# Altium PCB slave.PcbDoc
Units mm, origin at the board's own origin, x right, y up, seen from the top; angles counter-clockwise.
Board outline 152.4 x 101.6 mm, 2 copper layers (Top Layer, Bottom Layer); 3 components, 4 nets, 48 pads, 0 vias.
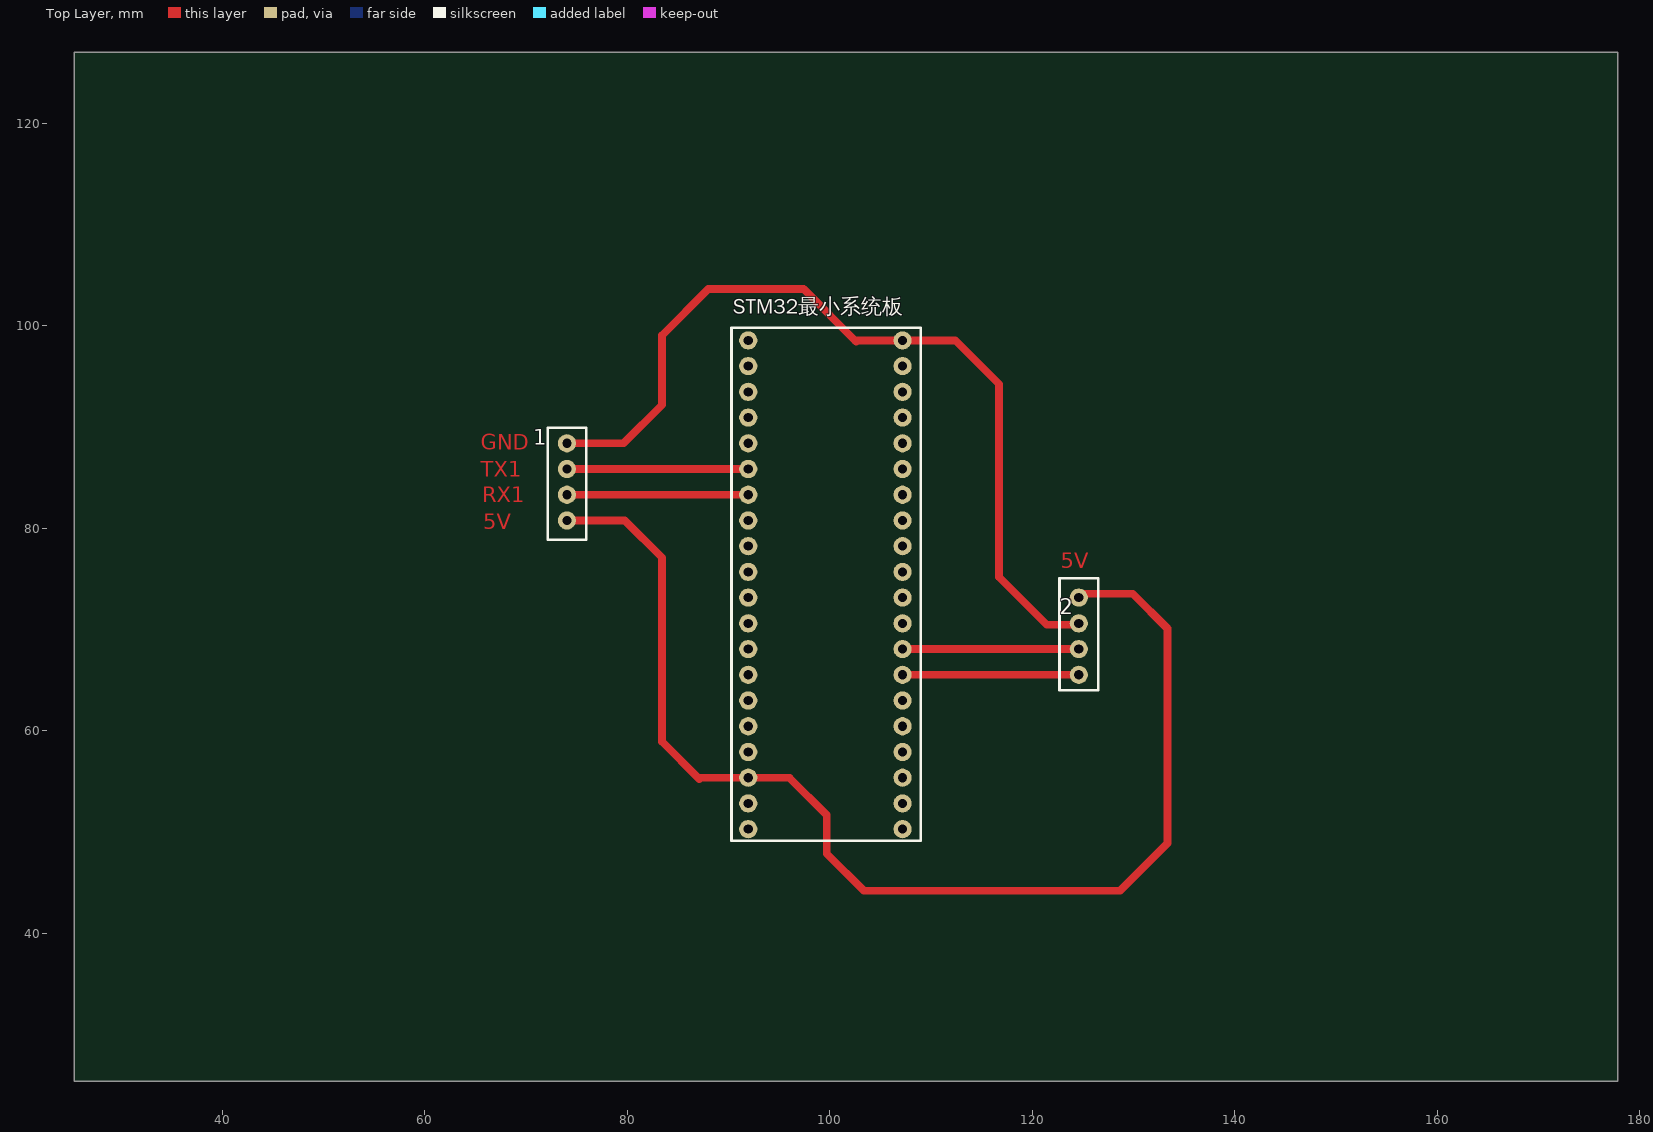
[diagram p0: Top Layer view]
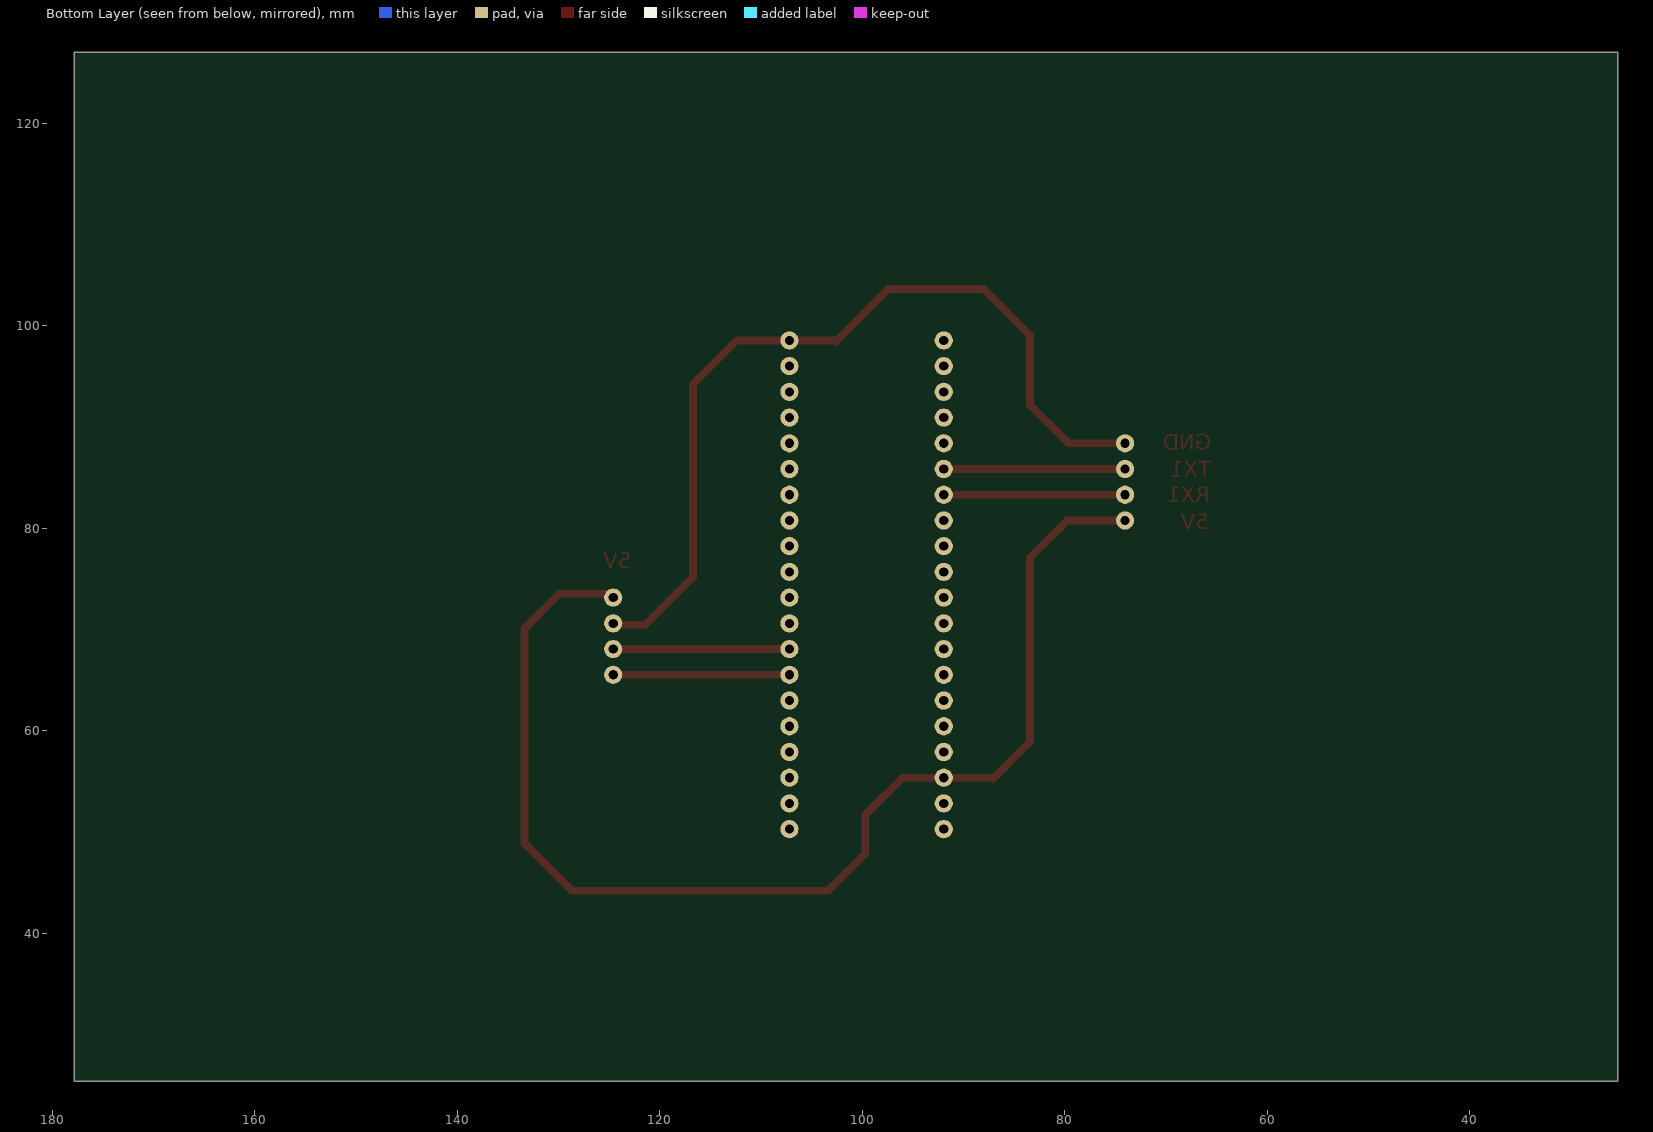
[diagram p1: Bottom Layer view, seen from below]

## Layer stack, top to bottom
Top Solder: solder mask 0.0102, Solder Resist, Dk 3.5
Top Layer: signal copper 0.0356
Dielectric 1: dielectric 0.32, FR-4, Dk 4.8
Bottom Layer: signal copper 0.0356
Bottom Solder: solder mask 0.0102, Solder Resist, Dk 3.5

## Board outline
25.4,25.4 177.8,25.4 177.8,127 25.4,127

## Design rules (kind name [scope] priority, off if disabled: settings)
Clearance [All] p1: gap=0.254
PolygonConnect [All] p1: connectstyle=Relief reliefconductorwidth=0.254 reliefentries=4 polygonreliefangle="90 Angle" airgapwidth=0.254
RoomDefinition slave [InComponentClass('slave')] p1: confinementstyle=ConfineIn formatcopy=TRUE lockcomponents=FALSE outline 0,0 50.8,0 50.8,25.4 0,25.4
RoutingVias [All] p1: holewidth=0.711 width=1.27 viastyle="Through Hole" minholewidth=0.711 minwidth=1.27 maxholewidth=0.711 maxwidth=1.27
SolderMaskExpansion [All] p1: expansion=0.102
Width [All] p1: maxlimit=0.254 minlimit=0.254 preferedwidth=0.254
30 further rules are at their usual default settings.

## Components (designator, comment, footprint, x,y, rotation, side; value= is the part's Value field where it differs from the comment)
1 "display" con4 74.041,80.772 r180 top
2 "bluetooth" con4 124.587,73.152 r0 top
STM32最小系统板 "STM32最小系统板" STM32最小系统板 91.948,98.552 r0 top

## Footprints (in the part's own frame and the unit in brackets; to place one, negate y for a bottom-side part, rotate by r counter-clockwise, add the part's x,y. Pads: shape width x height; smd on the part's side, far side on the other; paste and mask are expansions set on the pad)
con4 [mm]
  round 1.8 hole 0.9: 1(0,0) 2(0,-2.54) 3(0,-5.08) 4(0,-7.62)
  silkscreen extent -1.91,-9.14 1.91,1.91
STM32最小系统板 [mm]
  round 1.8 hole 0.9: 1(0,0) 2(0,-2.54) 3(0,-5.08) 4(0,-7.62) 5(0,-10.16) 6(0,-12.7) 7(0,-15.24) 8(0,-17.78) 9(0,-20.32) 10(0,-22.86) 11(0,-25.4) 12(0,-27.94) 13(0,-30.48) 14(0,-33.02) 15(0,-35.56) 16(0,-38.1) 17(0,-40.64) 18(0,-43.18) 19(0,-45.72) 20(0,-48.26) 21(15.24,0) 22(15.24,-2.54) 23(15.24,-5.08) 24(15.24,-7.62) 25(15.24,-10.16) 26(15.24,-12.7) 27(15.24,-15.24) 28(15.24,-17.78) 29(15.24,-20.32) 30(15.24,-22.86) 31(15.24,-25.4) 32(15.24,-27.94) 33(15.24,-30.48) 34(15.24,-33.02) 35(15.24,-35.56) 36(15.24,-38.1) 37(15.24,-40.64) 38(15.24,-43.18) 39(15.24,-45.72) 40(15.24,-48.26)
  silkscreen extent -1.65,-49.4 17.02,1.27

## Part data
1 2: library part Component_1

## Nets (pads, with @x,y where several pads share a name; then routed paths per layer and width w, separated by ;. In a path a pad name is that pad's centre, name@x,y a point inside that pad or via, vN(x,y) a via of type N, cw(c..) or ccw(c..) an arc to the next point about the centre after c; other vN are vias at no path point)
RX1: 1.2 STM32最小系统板.7 | length 17.9
  Top Layer w0.762: 1.2 STM32最小系统板.7
RX2: 2.3 STM32最小系统板.33 | length 17.4
  Top Layer w0.762: STM32最小系统板.33 2.3
TX1: 1.3 STM32最小系统板.6 | length 17.9
  Top Layer w0.762: 1.3 STM32最小系统板.6
TX2: 2.4 STM32最小系统板.34 | length 17.4
  Top Layer w0.762: STM32最小系统板.34 2.4
pads on no net: 1.1 1.4 2.1 2.2 STM32最小系统板.1 STM32最小系统板.2 STM32最小系统板.3 STM32最小系统板.4 STM32最小系统板.5 STM32最小系统板.8 STM32最小系统板.9 STM32最小系统板.10 STM32最小系统板.11 STM32最小系统板.12 STM32最小系统板.13 STM32最小系统板.14 STM32最小系统板.15 STM32最小系统板.16 STM32最小系统板.17 STM32最小系统板.18 STM32最小系统板.19 STM32最小系统板.20 STM32最小系统板.21 STM32最小系统板.22 STM32最小系统板.23 STM32最小系统板.24 STM32最小系统板.25 STM32最小系统板.26 STM32最小系统板.27 STM32最小系统板.28 STM32最小系统板.29 STM32最小系统板.30 STM32最小系统板.31 STM32最小系统板.32 STM32最小系统板.35 STM32最小系统板.36 STM32最小系统板.37 STM32最小系统板.38 STM32最小系统板.39 STM32最小系统板.40
copper on no net: | length 207.7
  Top Layer w0.762: 74.041,80.772 79.756,80.772 83.439,77.089 83.439,58.928 87.122,55.245 ; 74.041,88.392 79.629,88.392 83.439,92.202 83.439,99.06 88.011,103.632 97.409,103.632 102.616,98.425 ; 86.995,55.372 91.948,55.372 96.012,55.372 99.695,51.689 99.695,49.403 99.695,47.879 103.378,44.196 128.651,44.196 133.35,48.895 133.35,70.104 129.921,73.533 124.968,73.533 124.587,73.152 ; 102.489,98.552 107.188,98.552 112.395,98.552 116.713,94.234 116.713,75.946 ; 107.061,70.739 107.188,70.612 ; 107.061,73.279 107.188,73.152 ; 116.713,76.327 116.713,75.184 121.412,70.485 124.46,70.485 124.587,70.612

## Other copper
Top Layer:
  text "GND" at 65.532,87.757 h1.52
  text "TX1" at 65.532,85.09 h1.52
  text "RX1" at 65.659,82.55 h1.52
  text "5V" at 65.786,79.883 h1.52
  text "5V" at 122.809,76.073 h1.52